# Altium PCB CandoPro.PcbDoc
Units mil, origin at the board's own origin, x right, y up, seen from the top; angles counter-clockwise.
Board outline 2007.87 x 629.92 mil, 2 copper layers (Top Layer, Bottom Layer); 32 components, 22 nets, 145 pads, 75 vias.
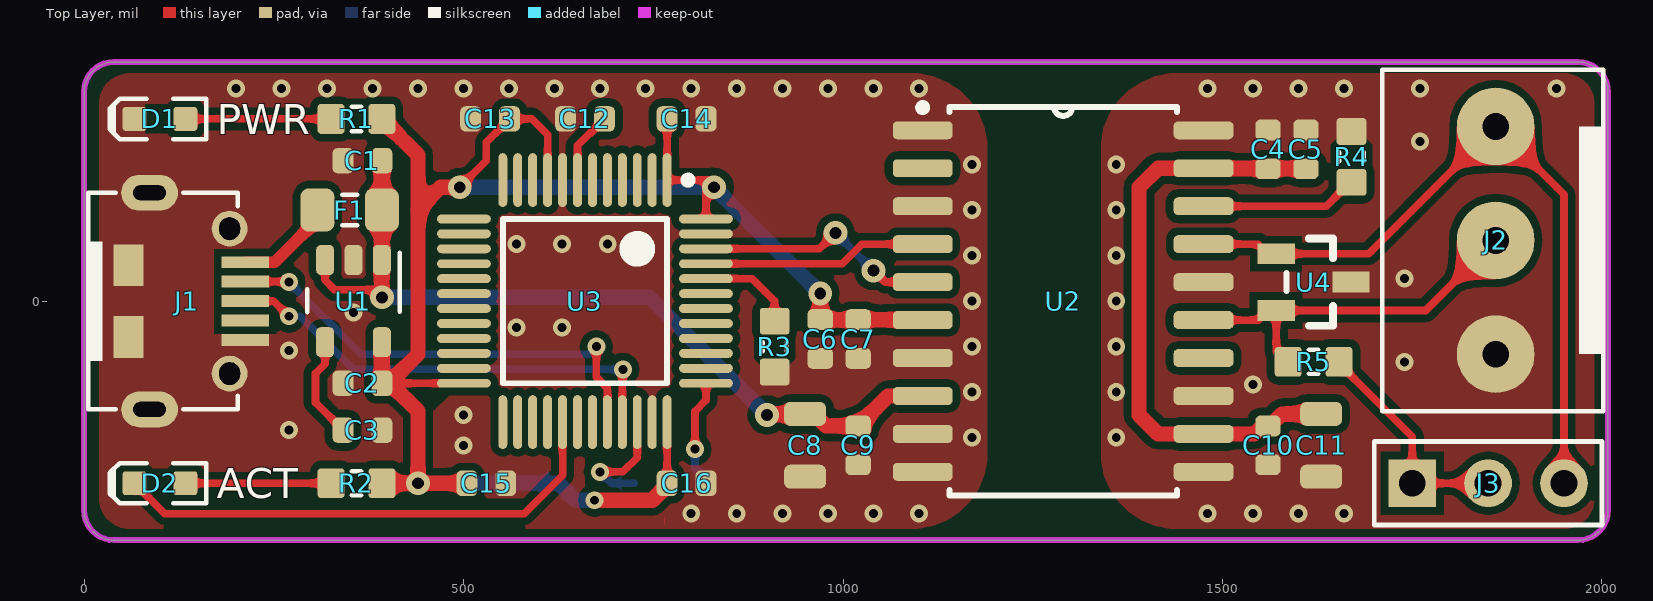
[diagram p0: Top Layer view]
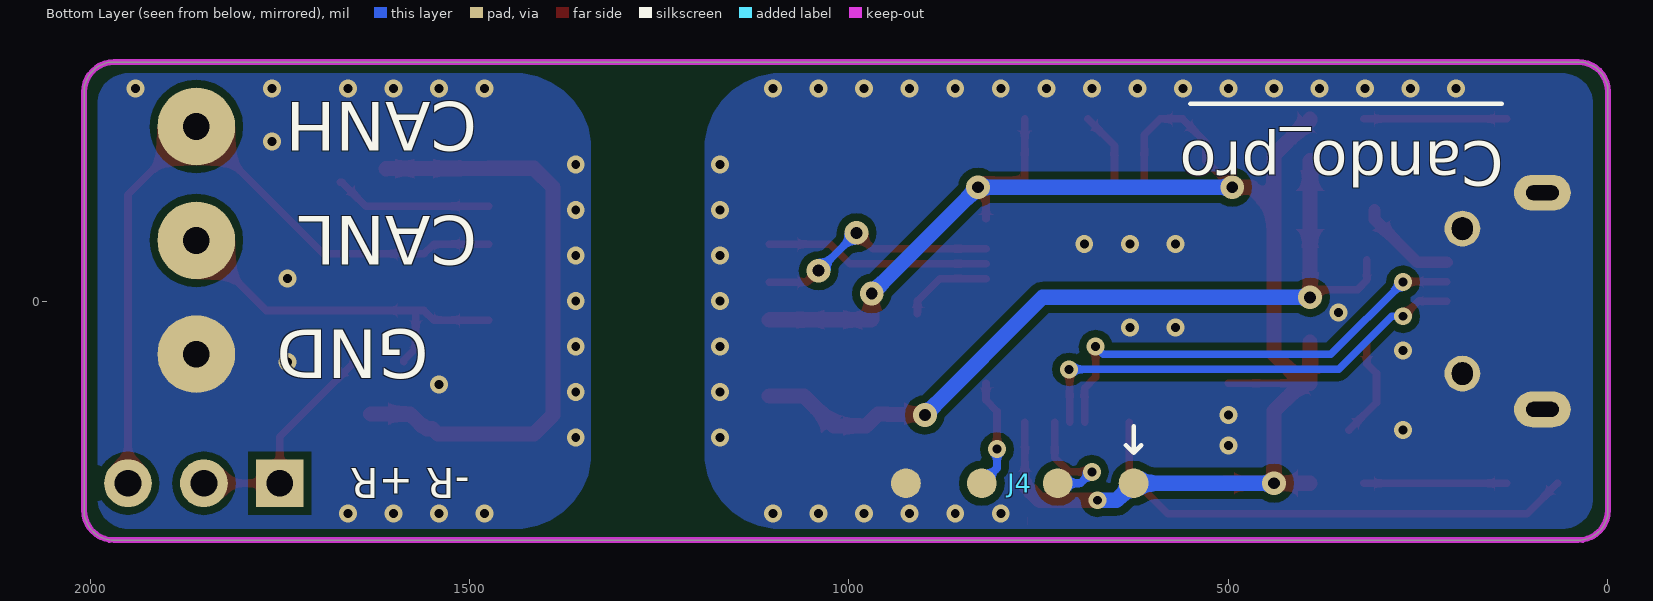
[diagram p1: Bottom Layer view, seen from below]
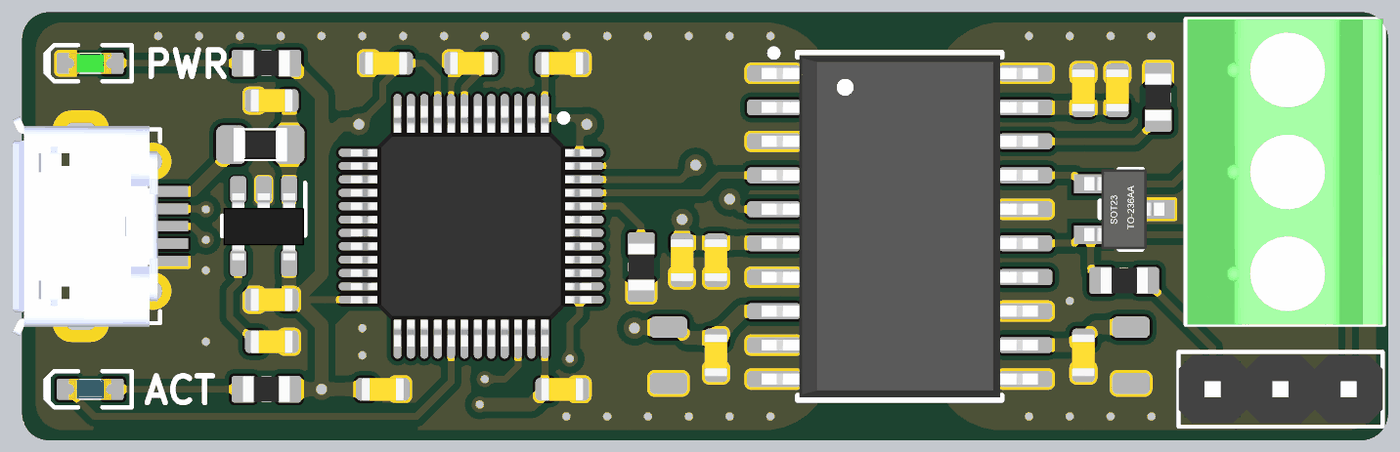
[diagram p2: 3D render of the assembled board from above, using the file's embedded part models]

## Layer stack, top to bottom
Top Solder: solder mask 0.4, Solder Resist, Dk 3.5
Top Layer: signal copper 1.4
Dielectric 1: dielectric 12.6, FR-4, Dk 4.8
Bottom Layer: signal copper 1.4
Bottom Solder: solder mask 0.4, Solder Resist, Dk 3.5

## Board outline
39.37,-314.96 cw(c39.37,-275.59) 0,-275.59 0,275.59 cw(c39.37,275.59) 39.37,314.96 1968.5,314.96 cw(c1968.5,275.59) 2007.87,275.59 2007.87,-275.59 cw(c1968.5,-275.59) 1968.5,-314.96

## Design rules (kind name [scope] priority, off if disabled: settings)
Clearance [InNamedPolygon('Bootom')] p1: gap=30 ignorepadtopadclearanceinfootprint=FALSE except(0: Arc-Hole Track-Hole SMDPad-Hole THPad-Hole Via-Hole Fill-Hole Poly-Hole Region-Hole Text-Hole)
Clearance Polygon [InPolygon] p2: gap=10 ignorepadtopadclearanceinfootprint=FALSE except(0: Arc-Hole Track-Hole SMDPad-Hole THPad-Hole Via-Hole Fill-Hole Poly-Hole Region-Hole Text-Hole)
PolygonConnect PolygonConnect_28 [All vs IsNamedPolygon('PGND_L02_P003')] p1: connectstyle=Direct reliefconductorwidth=10 reliefentries=4 polygonreliefangle="90 Angle" airgapwidth=10
PolygonConnect PolygonConnect_27 [All vs IsNamedPolygon('GND_L02_P002')] p2: connectstyle=Direct reliefconductorwidth=10 reliefentries=4 polygonreliefangle="90 Angle" airgapwidth=10
PolygonConnect PolygonConnect_26 [All vs IsNamedPolygon('PGND_L01_P001')] p3: connectstyle=Direct reliefconductorwidth=10 reliefentries=4 polygonreliefangle="90 Angle" airgapwidth=10
PolygonConnect PolygonConnect_25 [All vs IsNamedPolygon('GND_L01_P000')] p4: connectstyle=Direct reliefconductorwidth=10 reliefentries=4 polygonreliefangle="90 Angle" airgapwidth=10
PolygonConnect PolygonConnect_24 [All vs IsNamedPolygon('GND_L01_P000')] p5: connectstyle=Direct reliefconductorwidth=10 reliefentries=4 polygonreliefangle="90 Angle" airgapwidth=10
PolygonConnect PolygonConnect_23 [All vs IsNamedPolygon('GND_L01_P000')] p6: thpad.connectstyle=Direct thpad.reliefconductorwidth=10 thpad.reliefentries=4 thpad.polygonreliefangle="90 Angle" thpad.airgapwidth=10 smdpad.connectstyle=Relief smdpad.reliefconductorwidth=10 smdpad.reliefentries=4 smdpad.polygonreliefangle="90 Angle" smdpad.airgapwidth=10 via.connectstyle=Relief via.reliefconductorwidth=10 via.reliefentries=4 via.polygonreliefangle="90 Angle" via.airgapwidth=10
PolygonConnect PolygonConnect_22 [All vs IsNamedPolygon('Top')] p7: connectstyle=Direct reliefconductorwidth=10 reliefentries=4 polygonreliefangle="90 Angle" airgapwidth=10
PolygonConnect PolygonConnect_21 [All vs IsNamedPolygon('Bottom')] p8: connectstyle=Direct reliefconductorwidth=10 reliefentries=4 polygonreliefangle="90 Angle" airgapwidth=10
PolygonConnect PolygonConnect_20 [All vs IsNamedPolygon('Top Layer-No Net')] p9: connectstyle=Direct reliefconductorwidth=10 reliefentries=4 polygonreliefangle="90 Angle" airgapwidth=10
PolygonConnect PolygonConnect_19 [All vs IsNamedPolygon('GND_L02_P006')] p10: connectstyle=Direct reliefconductorwidth=10 reliefentries=4 polygonreliefangle="90 Angle" airgapwidth=10
PolygonConnect PolygonConnect_18 [All vs IsNamedPolygon('GND_L02_P006')] p11: connectstyle=Direct reliefconductorwidth=10 reliefentries=4 polygonreliefangle="90 Angle" airgapwidth=10
PolygonConnect PolygonConnect_17 [All vs IsNamedPolygon('GND_L02_P006')] p12: connectstyle=Direct reliefconductorwidth=10 reliefentries=4 polygonreliefangle="90 Angle" airgapwidth=10
PolygonConnect PolygonConnect_16 [All vs IsNamedPolygon('GND_L02_P006')] p13: connectstyle=Direct reliefconductorwidth=10 reliefentries=4 polygonreliefangle="90 Angle" airgapwidth=10
PolygonConnect PolygonConnect_15 [All vs IsNamedPolygon('Bootom')] p14: connectstyle=Direct reliefconductorwidth=10 reliefentries=4 polygonreliefangle="90 Angle" airgapwidth=10
PolygonConnect PolygonConnect_14 [All vs IsNamedPolygon('Bootom')] p15: connectstyle=Relief reliefconductorwidth=10 reliefentries=4 polygonreliefangle="90 Angle" airgapwidth=10
PolygonConnect PolygonConnect_13 [All vs IsNamedPolygon('Bootom')] p16: connectstyle=Relief reliefconductorwidth=10 reliefentries=4 polygonreliefangle="90 Angle" airgapwidth=100
PolygonConnect PolygonConnect_12 [All vs IsNamedPolygon('Bootom')] p17: connectstyle=Direct reliefconductorwidth=10 reliefentries=4 polygonreliefangle="90 Angle" airgapwidth=10
PolygonConnect PolygonConnect_11 [All vs IsNamedPolygon('NONET_L02_P012')] p18: connectstyle=Direct reliefconductorwidth=10 reliefentries=4 polygonreliefangle="90 Angle" airgapwidth=10
PolygonConnect PolygonConnect_10 [All vs IsNamedPolygon('NONET_L02_P012')] p19: connectstyle=Direct reliefconductorwidth=10 reliefentries=4 polygonreliefangle="90 Angle" airgapwidth=10
PolygonConnect PolygonConnect_9 [All vs IsNamedPolygon('Top')] p20: connectstyle=Direct reliefconductorwidth=10 reliefentries=4 polygonreliefangle="90 Angle" airgapwidth=10
PolygonConnect PolygonConnect_8 [All vs IsNamedPolygon('GND_L02_P006')] p21: connectstyle=Direct reliefconductorwidth=10 reliefentries=4 polygonreliefangle="90 Angle" airgapwidth=10
PolygonConnect PolygonConnect_7 [All vs IsNamedPolygon('GND_L02_P006')] p22: connectstyle=Direct reliefconductorwidth=10 reliefentries=4 polygonreliefangle="90 Angle" airgapwidth=10
PolygonConnect PolygonConnect_6 [All vs IsNamedPolygon('GND_L02_P006')] p23: connectstyle=Direct reliefconductorwidth=10 reliefentries=4 polygonreliefangle="90 Angle" airgapwidth=10
PolygonConnect PolygonConnect_5 [All vs IsNamedPolygon('GND_L02_P004')] p24: connectstyle=Direct reliefconductorwidth=10 reliefentries=4 polygonreliefangle="90 Angle" airgapwidth=10
PolygonConnect PolygonConnect_4 [All vs IsNamedPolygon('GND_L02_P004')] p25: connectstyle=Direct reliefconductorwidth=10 reliefentries=4 polygonreliefangle="90 Angle" airgapwidth=10
PolygonConnect PolygonConnect_3 [All vs IsNamedPolygon('GND_L02_P004')] p26: connectstyle=Direct reliefconductorwidth=10 reliefentries=4 polygonreliefangle="90 Angle" airgapwidth=10
PolygonConnect PolygonConnect_2 [All vs IsNamedPolygon('GND_L02_P004')] p27: connectstyle=Direct reliefconductorwidth=10 reliefentries=4 polygonreliefangle="90 Angle" airgapwidth=10
PolygonConnect PolygonConnect_1 [All vs IsNamedPolygon('GND_L02_P004')] p28: connectstyle=Direct reliefconductorwidth=10 reliefentries=4 polygonreliefangle="90 Angle" airgapwidth=10
PolygonConnect [All] p29: connectstyle=Relief reliefconductorwidth=10 reliefentries=4 polygonreliefangle="90 Angle" airgapwidth=10
RoutingVias [All] p1: holewidth=28 width=50 viastyle="Through Hole" minholewidth=7.87 minwidth=3.94 maxholewidth=78.74 maxwidth=393.7
SolderMaskExpansion [All] p1: expansion=4 istentingtop=FALSE
Width [All] p1: maxlimit=236.22 minlimit=3.94 preferedwidth=10
30 further rules are at their usual default settings.

## Components (designator, comment, footprint, x,y, rotation, side; value= is the part's Value field where it differs from the comment)
C1 "4.7μF" CAP_0603 366.81,185 r0 top
C2 "4.7μF" CAP_0603 366.81,-108.27 r0 top
C3 "22nF" CAP_0603 366.81,-170 r180 top
C4 "10nF" CAP_0603 1560,200 r90 top
C5 "100nF" CAP_0603 1610,200 r90 top
C6 "100nF" CAP_0603 970,-50 r90 top
C7 "10nF" CAP_0603 1020,-50 r90 top
C8 "10μF" CAP_0805 950,-190 r90 top
C9 "100nF" CAP_0603 1020,-190 r90 top
C10 "100nF" CAP_0603 1560,-190 r90 top
C11 "10μF" CAP_0805 1630,-190 r90 top
C12 "100nF" CAP_0603 660,240 r0 top
C13 "100nF" CAP_0603 535,240 r0 top
C14 "100nF" CAP_0603 793.86,240 r180 top
C15 "100nF" CAP_0603 530,-240 r180 top
C16 "100nF" CAP_0603 793.86,-240 r180 top
D1 "green" LED_GREEN_0603 100,240 r180 top
D2 "blue" LED_BLUE_0603 100,-240 r180 top
F1 "PTC_0805" RES_0805 349.94,120 r0 top
J1 "MicroUSB-B" MICRO-USB-B 137.48,0 r0 top
J2 "WJ124-3.81-3P" WJ124-3.81-3P 1860,80 r0 top
J3 "Header_2.54_3P" HEADER-2.54-3P 1850,-240 r90 top
J4 "SWD" SWD-2.54-4P 775,-240 r270 bottom
R1 "10K" RES_0603 358.94,240 r0 top
R2 "10K" RES_0603 358.94,-240 r0 top
R3 "10K" RES_0603 910,-60 r270 top
R4 "10R" RES_0603 1670,190 r90 top
R5 "120R" RES_0603 1620,-80 r180 top
U1 "RT9193-33GB" SOT23-5 355,0 r270 top
U2 "ADM3053BRWZ" SOIC-20 1290,0 r0 top
U3 "STM32F072C8T6" STM-LQFP48_N 660,0 r270 top
U4 "PSM712-LF-T7" SOT-23(SOT-23-3) 1620,25 r180 top

## Footprints (in the part's own frame and the unit in brackets; to place one, negate y for a bottom-side part, rotate by r counter-clockwise, add the part's x,y. Pads: shape width x height; smd on the part's side, far side on the other; paste and mask are expansions set on the pad)
CAP_0603 [mm]
  rrect50% 0.7x0.85 smd: 1(-0.65,0) 2(0.65,0)
  body extent -0.8,-0.43 0.8,0.43, height 0.8
CAP_0805 [mm]
  rrect50% 0.8x1.4 smd: 1(-1.05,0) 2(1.05,0)
  body extent -1,-0.62 1,0.63, height 0.5
HEADER-2.54-3P [mm]
  rect 1.6x1.6 hole 0.9: 1(0,2.54)
  round 1.6 hole 0.9: 2(0,0) 3(0,-2.54)
  silkscreen extent -1.4,-3.81 1.4,3.81, body extent -1.27,-3.81 1.27,3.81, height 8
LED_BLUE_0603 [mm]
  rrect25% 0.8x0.8 smd: A(-0.85,0) K(0.85,0)
  Top Layer pour cut-out: -0.5,0.5 0.5,0.5 0.5,-0.5 -0.5,-0.5
  silkscreen extent -1.55,-0.67 1.68,0.67, body extent -0.8,-0.4 0.8,0.4, height 0.6
LED_GREEN_0603 [mm]
  rrect25% 0.8x0.8 smd: A(-0.85,0) K(0.85,0)
  Top Layer pour cut-out: -0.5,0.5 0.5,0.5 0.5,-0.5 -0.5,-0.5
  silkscreen extent -1.55,-0.67 1.68,0.67, body extent -0.8,-0.4 0.8,0.4, height 0.6
MICRO-USB-B [mm]
  rect 1.6x0.4 smd: 1(1.9,1.3) 2(1.9,0.65) 3(1.9,0) 4(1.9,-0.65) 5(1.9,-1.3)
  rect 1x1.4 smd: 6(-2,-1.2) 6(-2,1.2)
  oval 1.9x1.2 hole 0.5 slot 1.1 at 0 deg: 6(-1.3,-3.625) 6(-1.3,3.625)
  round 1.2 hole 0.7 slot 0.762 at 90 deg: 6(1.38,-2.425) 6(1.38,2.425)
  silkscreen extent -3.37,-3.62 1.66,3.63, body extent -3.86,-4.1 1.57,4.1, height 2.72
RES_0603 [mm]
  rrect25% 0.9x1 smd: 1(-0.85,0) 2(0.85,0)
  Top Layer pour cut-out: -0.6,0.5 -0.4,0.7 0.4,0.7 0.6,0.5 0.6,-0.5 0.4,-0.7 -0.4,-0.7 -0.6,-0.5
  silkscreen extent -0.15,-0.41 0.15,0.41, body extent -0.87,-0.47 0.88,0.48, height 0.54
RES_0805 [mil]
  rrect50% 45x57.09 smd: 1(-42.46,0) 2(42.46,0)
  silkscreen extent -10,-20 10,20, body extent -39,-25 39,25, height 20
SOIC-20 [mm]
  rrect50% 2x0.6 smd: 1(-4.699,5.715) 2(-4.699,4.445) 3(-4.699,3.175) 4(-4.699,1.905) 5(-4.699,0.635) 6(-4.699,-0.635) 7(-4.699,-1.905) 8(-4.699,-3.175) 9(-4.699,-4.445) 10(-4.699,-5.715) 11(4.699,-5.715) 12(4.699,-4.445) 13(4.699,-3.175) 14(4.699,-1.905) 15(4.699,-0.635) 16(4.699,0.635) 17(4.699,1.905) 18(4.699,3.175) 19(4.699,4.445) 20(4.699,5.715)
  silkscreen extent -4.82,-6.5 3.81,6.6, body extent -5.16,-6.4 5.16,6.4, height 2.6
SOT23-5 [mm]
  rrect50% 1x0.6 smd paste+0 mask+0.051: 1(-1.375,0.95) 2(-1.375,0) 3(-1.375,-0.95) 4(1.375,-0.95) 5(1.375,0.95)
  silkscreen extent -1.63,-1.55 0.38,1.55, body extent -1.23,-1.5 1.27,1.5, height 1.05
SOT-23(SOT-23-3) [mm]
  rect 1.25x0.7 smd: 1(1.25,-0.95) 2(1.25,0.95) 3(-1.25,0)
  silkscreen extent -0.65,-1.46 0.9,1.46, body extent -1.5,-1.5 1.5,1.5, height 1.3
STM-LQFP48_N [mm] "QFP, 48-Leads, Body 7x7mm, Pitch 0.5mm, IPC Medium Density"
  oval 1.8x0.3 smd: 1(-4.05,2.75) 2(-4.05,2.25) 3(-4.05,1.75) 4(-4.05,1.25) 5(-4.05,0.75) 6(-4.05,0.25) 7(-4.05,-0.25) 8(-4.05,-0.75) 9(-4.05,-1.25) 10(-4.05,-1.75) 11(-4.05,-2.25) 12(-4.05,-2.75) 25(4.05,-2.75) 26(4.05,-2.25) 27(4.05,-1.75) 28(4.05,-1.25) 29(4.05,-0.75) 30(4.05,-0.25) 31(4.05,0.25) 32(4.05,0.75) 33(4.05,1.25) 34(4.05,1.75) 35(4.05,2.25) 36(4.05,2.75)
  oval 0.3x1.8 smd: 13(-2.75,-4.05) 14(-2.25,-4.05) 15(-1.75,-4.05) 16(-1.25,-4.05) 17(-0.75,-4.05) 18(-0.25,-4.05) 19(0.25,-4.05) 20(0.75,-4.05) 21(1.25,-4.05) 22(1.75,-4.05) 23(2.25,-4.05) 24(2.75,-4.05) 37(2.75,4.05) 38(2.25,4.05) 39(1.75,4.05) 40(1.25,4.05) 41(0.75,4.05) 42(0.25,4.05) 43(-0.25,4.05) 44(-0.75,4.05) 45(-1.25,4.05) 46(-1.75,4.05) 47(-2.25,4.05) 48(-2.75,4.05)
  silkscreen extent -4.17,-2.75 2.75,3.58, body extent -4.5,-4.5 4.5,4.5, height 1.6
SWD-2.54-4P [mm]
  round 1 smd paste-5: 1(0,3.81) 2(0,1.27) 3(0,-1.27) 4(0,-3.81)
WJ124-3.81-3P [mm]
  round 2.6 hole 0.9: 1(0,3.81) 2(0,0) 3(0,-3.81)
  silkscreen extent -3.8,-5.71 3.6,5.71, body extent -3.74,-5.72 3.56,5.71, height 8.5

## Part data
C1 C2: library part CAP_4.7μF_0603, "Cap 4.7μF 6.3V X5R 0603"
C3: library part CAP_22nF_0603, "Cap 22nF 50V X5R 0603"
C4 C7: library part CAP_10nF_0603, "Cap 10nF 50V X5R 0603"
C5 C6 C9 C10 C12 C13 C14 C15 C16: library part CAP_100nF_0603, "Cap 100nF 50V X5R 0603"
C8 C11: library part CAP_10μF_0805, "Cap 10μF 25V X5R 0805"
D1: library part LED_GREEN_0603, "LED green 0603"
D2: library part LED_BLUE_0603, "LED blue 0603"
F1: "PTC 0.5A 0805 C20978"
J1: "MicroUSB-B-SMT C10418"
J2: "WJ124-3.81-3P C36780"
J3: "Header 2.54 3P"
J4: "SWD 2.54 4P"
R1 R2 R3: library part RES_10K_0603, "Res SMD 10K 5% 1/10W 0603"
R4: library part RES_10R_0603, "Res SMD 10R 5% 1/10W 0603"
R5: library part RES_120R_0603, "Res SMD 120R 5% 1/10W 0603"
U1: "Chip RT9193-33GB LDO Regulator C15651"
U2: "Chip ADM3053BRWZ"
U3: "Chip STM32F072C8T6 C80488"
U4: "TVS", Package=SOT-23(SOT-23-3), SuppliersPartNumber=C32677, ComponentLink1Description=供应商链接, ComponentLink1URL=http://www.szlcsc.com/product/details_33642.html, Supplier=LC

## Via types
v1: diameter 23.62, hole 11.81, Top Layer to Bottom Layer, tented both sides, 67 vias
v2: diameter 31.5, hole 15.75, Top Layer to Bottom Layer, tented both sides, 8 vias

## Nets (pads, with @x,y where several pads share a name; then routed paths per layer and width w, separated by ;. In a path a pad name is that pad's centre, name@x,y a point inside that pad or via, vN(x,y) a via of type N, cw(c..) or ccw(c..) an arc to the next point about the centre after c; other vN are vias at no path point)
5V: C1.2 C8.2 C9.2 F1.2 U1.1 U1.3 U2.8 | length 1091
  Top Layer w10: U1.3 317.6,27.4 330,15 382.4,15 v2(392.4,5)
  Top Layer w20: v2(392.4,5) U1.1 F1.2 C1.2 ; v2(900,-150) 900.67,-149.33 949.33,-149.33 C8.2 961.81,-148.66 977.56,-164.41 C9.2 1059.41,-125 U2.8
  Bottom Layer w20: v2(392.4,5) 745,5 v2(900,-150)
BOOT0: R3.1 U3.44 | length 119.3
  Top Layer w10: U3.44 880.47,29.53 909.68,0.32 909.68,-13.82 910,-14.14 R3.1@910,-16.54
CAN_RX: U2.4 U3.45 | length 296.2
  Top Layer w10: U3.45 999.21,49.21 1025,75 U2.4
CAN_TX: U2.5 U3.46 | length 321.2
  Top Layer w10: U3.46 968.9,68.9 v2(990,90) ; v2(1040,40) 1040.79,40 1055.79,25 U2.5
  Bottom Layer w10: v2(990,90) v2(1040,40)
CANH: J2.1 J3.3 U2.17 U4.1 | length 966.9
  Top Layer w10: U2.17 1547.36,75 1559.96,62.4 U4.1 1692.4,62.4 J2.1 1950,140 J3.3
CANL: J2.2 R5.2 U2.15 U4.2 | length 502.6
  Top Layer w10: U2.15 1547.36,-25 1559.96,-12.4 U4.2 ; R5.2 1586.54,-78.03 1570.79,-62.28 U4.2 ; J2.2 1767.6,-12.4 U4.2
GND: C1.1 C2.1 C3.1 C6.1 C7.1 C8.1 C9.1 C12.1 C13.1 C14.1 C15.1 C16.1 D1.K J1.5 J1.6 J4.4 R3.2 U1.2 U2.1 U2.3 U2.7 U2.9 U2.10 U3.8 U3.23 U3.35 U3.47
  other v1: 800,-280 860,-280 920,-280 980,-280 1040,-280 1100,-280 500,-190 1170,-180 270,-170 500,-150 1170,-120 270,-65 1170,-60 570,-35 630,-35 355,-15 1170,0 1170,60 570,75 630,75 690,75 1170,120 1170,180 200,280 260,280 320,280 380,280 440,280 500,280 560,280 620,280 680,280 740,280 800,280 860,280 920,280 980,280 1040,280 1100,280
LED_ACT: D2.K U3.29 | length 671.5
  Top Layer w10: D2.K 106.54,-280 580,-280 630.47,-229.53 U3.29
NetC3_2: C3.2 U1.4 | length 136.1
  Top Layer w10: U1.4 317.6,-82.4 305,-95 305,-133.78 C3.2
NetC4_1: C4.1 C5.1 C10.2 C11.2 U2.12 U2.19 | length 792
  Top Layer w20: C5.1 1609.7,174.7 1560,174.7 1475.3,174.7 U2.19 1474.93,174.93 1414.93,174.93 1390,150 1390,-150 1414.93,-174.93 1474.93,-174.93 U2.12 1541.74,-175 1548.55,-168.19 1556.22,-168.19 C10.2 1562.95,-164.41 1566.73,-160.63 1566.73,-160.38 1578.45,-148.66 C11.2
NetC12_2: C12.2 U3.7 | length 95.2
  Top Layer w10: U3.7 650.16,204.57 C12.2
NetD1_A: D1.A R1.1 | length 188.1
  Top Layer w10: D1.A R1.1@321.54,240
NetD2_A: D2.A R2.1 | length 188.1
  Top Layer w10: D2.A R2.1@321.54,-240
NetF1_1: F1.1 J1.1 | length 131
  Top Layer w15.75: J1.1 251.18,51.18 307.47,107.47 F1.1
NetJ3_1: J3.1 J3.2 R5.1 | length 300
  Top Layer w10: R5.1 1653.46,-81.97 1750,-178.5 J3.1 J3.2
NetR4_1: R4.1 U2.18 | length 208.1
  Top Layer w10: U2.18 1636.5,125 1668.03,156.54 R4.1
PGND: C4.2 C5.2 C10.1 C11.1 J2.3 R4.2 U2.11 U2.13 U2.16 U2.20 U4.3
  other v1: 1480,-280 1540,-280 1600,-280 1660,-280 1360,-180 1360,-120 1540,-110 1740,-80 1360,-60 1360,0 1740,30 1360,60 1360,120 1360,180 1760,210 1480,280 1540,280 1600,280 1660,280 1760,280 1940,280
SWCLK: J4.3 U3.37 | length 146
  Top Layer w10: v1(805,-195) 805,-145 819.45,-130.55 U3.37
  Bottom Layer w10: v1(805,-195) 805,-220 J4.3
SWDIO: J4.2 U3.34 | length 154.6
  Top Layer w10: v1(680,-225) 710,-225 728.9,-206.1 U3.34
  Bottom Layer w10: v1(680,-225) 695,-240 J4.2
USB_DM: J1.2 U3.32 | length 611.9
  Top Layer w10: J1.2 269.41,25.59 v1(270,25) ; v1(675,-60) 675,-100 689.53,-114.53 U3.32
  Bottom Layer w10: v1(270,25) 365,-70 665,-70 v1(675,-60)
USB_DP: J1.3 U3.33 | length 604.8
  Top Layer w10: J1.3 250,0 v1(270,-20) ; U3.33 709.21,-90.79 v1(710,-90)
  Bottom Layer w10: v1(270,-20) 285,-20 355,-90 v1(710,-90)
V3.3: C2.2 C6.2 C7.2 C13.2 C14.2 C15.2 C16.2 J4.1 R1.2 R2.2 U1.5 U2.6 U3.1 U3.9 U3.24 U3.36 U3.48 | length 2448.4
  Top Layer w10: C2.2 401.73,-108.27 403.27,-108.27 U3.24 ; v2(495,150) 530,185 530,209.41 C13.2 590,240 610.79,219.21 U3.9 ; C16.2 U3.36 ; C14.2 U3.1 820.55,159.45 v2(830,150) 819.45,139.45 U3.48
  Top Layer w20: R2.2 v2(440,-240) ; C2.2 U1.5 ; R1.2 392.4,238.03 400.12,230.31 402.09,230.31 440,192.4 440,120 ; C2.2@401.73,-108.27 440,-70 440,120 ; C2.2@403.27,-108.27 440,-145 v2(440,-240) ; v2@482.4,150 470,150 440,120 ; C15.2 v2(440,-240) ; v1(672.6,-262.4) 748.82,-262.4 768.27,-242.95 C16.2 ; v2(970,10) C6.2 970.3,-24.7 1104.7,-24.7 U2.6 U2.6@1077.44,-25
  Bottom Layer w20: v2(440,-240) J4.1 647.4,-262.4 v1(672.6,-262.4) ; v2(495,150) v2(830,150) v2(970,10)
pads on no net: J1.4 U2.2 U2.14 U3.2 U3.3 U3.4 U3.5 U3.6 U3.10 U3.11 U3.12 U3.13 U3.14 U3.15 U3.16 U3.17 U3.18 U3.19 U3.20 U3.21 U3.22 U3.25 U3.26 U3.27 U3.28 U3.30 U3.31 U3.38 U3.39 U3.40 U3.41 U3.42 U3.43

## Polygon pours and split planes (outlines as drawn)
PGND on Top Layer "PGND_L01_P001" (solid, pour order 1): 1950,300 1440,300 ccw(c1440,200) 1340,200 1340,-200 ccw(c1440,-200) 1440,-300 1950,-300 ccw(c1950,-260) 1990,-260 1990,260 ccw(c1950,260)
GND on Top Layer "GND_L01_P000" (solid, pour order 0): 20,260 cw(c60,260) 60,300 1090,300 cw(c1090,200) 1190,200 1190,-200 cw(c1090,-200) 1090,-300 60,-300 cw(c60,-260) 20,-260
GND on Bottom Layer "GND_L02_P002" (solid, pour order 2): 20,260 cw(c60,260) 60,300 1090,300 cw(c1090,200) 1190,200 1190,-200 cw(c1090,-200) 1090,-300 60,-300 cw(c60,-260) 20,-260
PGND on Bottom Layer "PGND_L02_P003" (solid, pour order 3): 1950,300 1440,300 ccw(c1440,200) 1340,200 1340,-200 ccw(c1440,-200) 1440,-300 1950,-300 ccw(c1950,-260) 1990,-260 1990,260 ccw(c1950,260)

## Keep-outs
Keep-Out Layer:
  the board outline again, w7.87

## Other copper
Top Layer:
  pour cut-out: 760,-180 660,-180 660,-249.8 685.2,-275 760,-275
  pour cut-out: 395,-285 585,-285 585,-260 395,-260
  pour cut-out: 440,-60 490,-60 490,-100 440,-100
  pour cut-out: 485.39,-120 455.39,-150 430,-150 430,-120

## Silkscreen, mask and mechanical layers (free items; w line width, h text height)
Top Overlay:
  text "PWR" at 175,220 h39.37
  text "ACT" at 175,-260 h39.37
Bottom Overlay:
  lines w6: 140,260 550,260 ; 615,-190 625,-200 ; 625,-165 625,-200 ; 635,-190 625,-200
  text "CANH" at 1490,261.99 h64 r180
  text "Cando_pro" at 137,229 h100 r180
  text "CANL" at 1490,111.99 h64 r180
  text "GND" at 1553.98,-38.01 h64 r180
  text "-R +R" at 1500,-220.32 h39.37 r180